# Altium PCB STM32_PCB.PcbDoc
Units mm, origin at the board's own origin, x right, y up, seen from the top; angles counter-clockwise.
Board outline 36.5 x 35.7 mm, 4 copper layers (L1(Signal), L2(GND), L3(GND), L4(Signal)), stack 1.57 mm thick; 35 components, 27 nets, 173 pads, 104 vias.
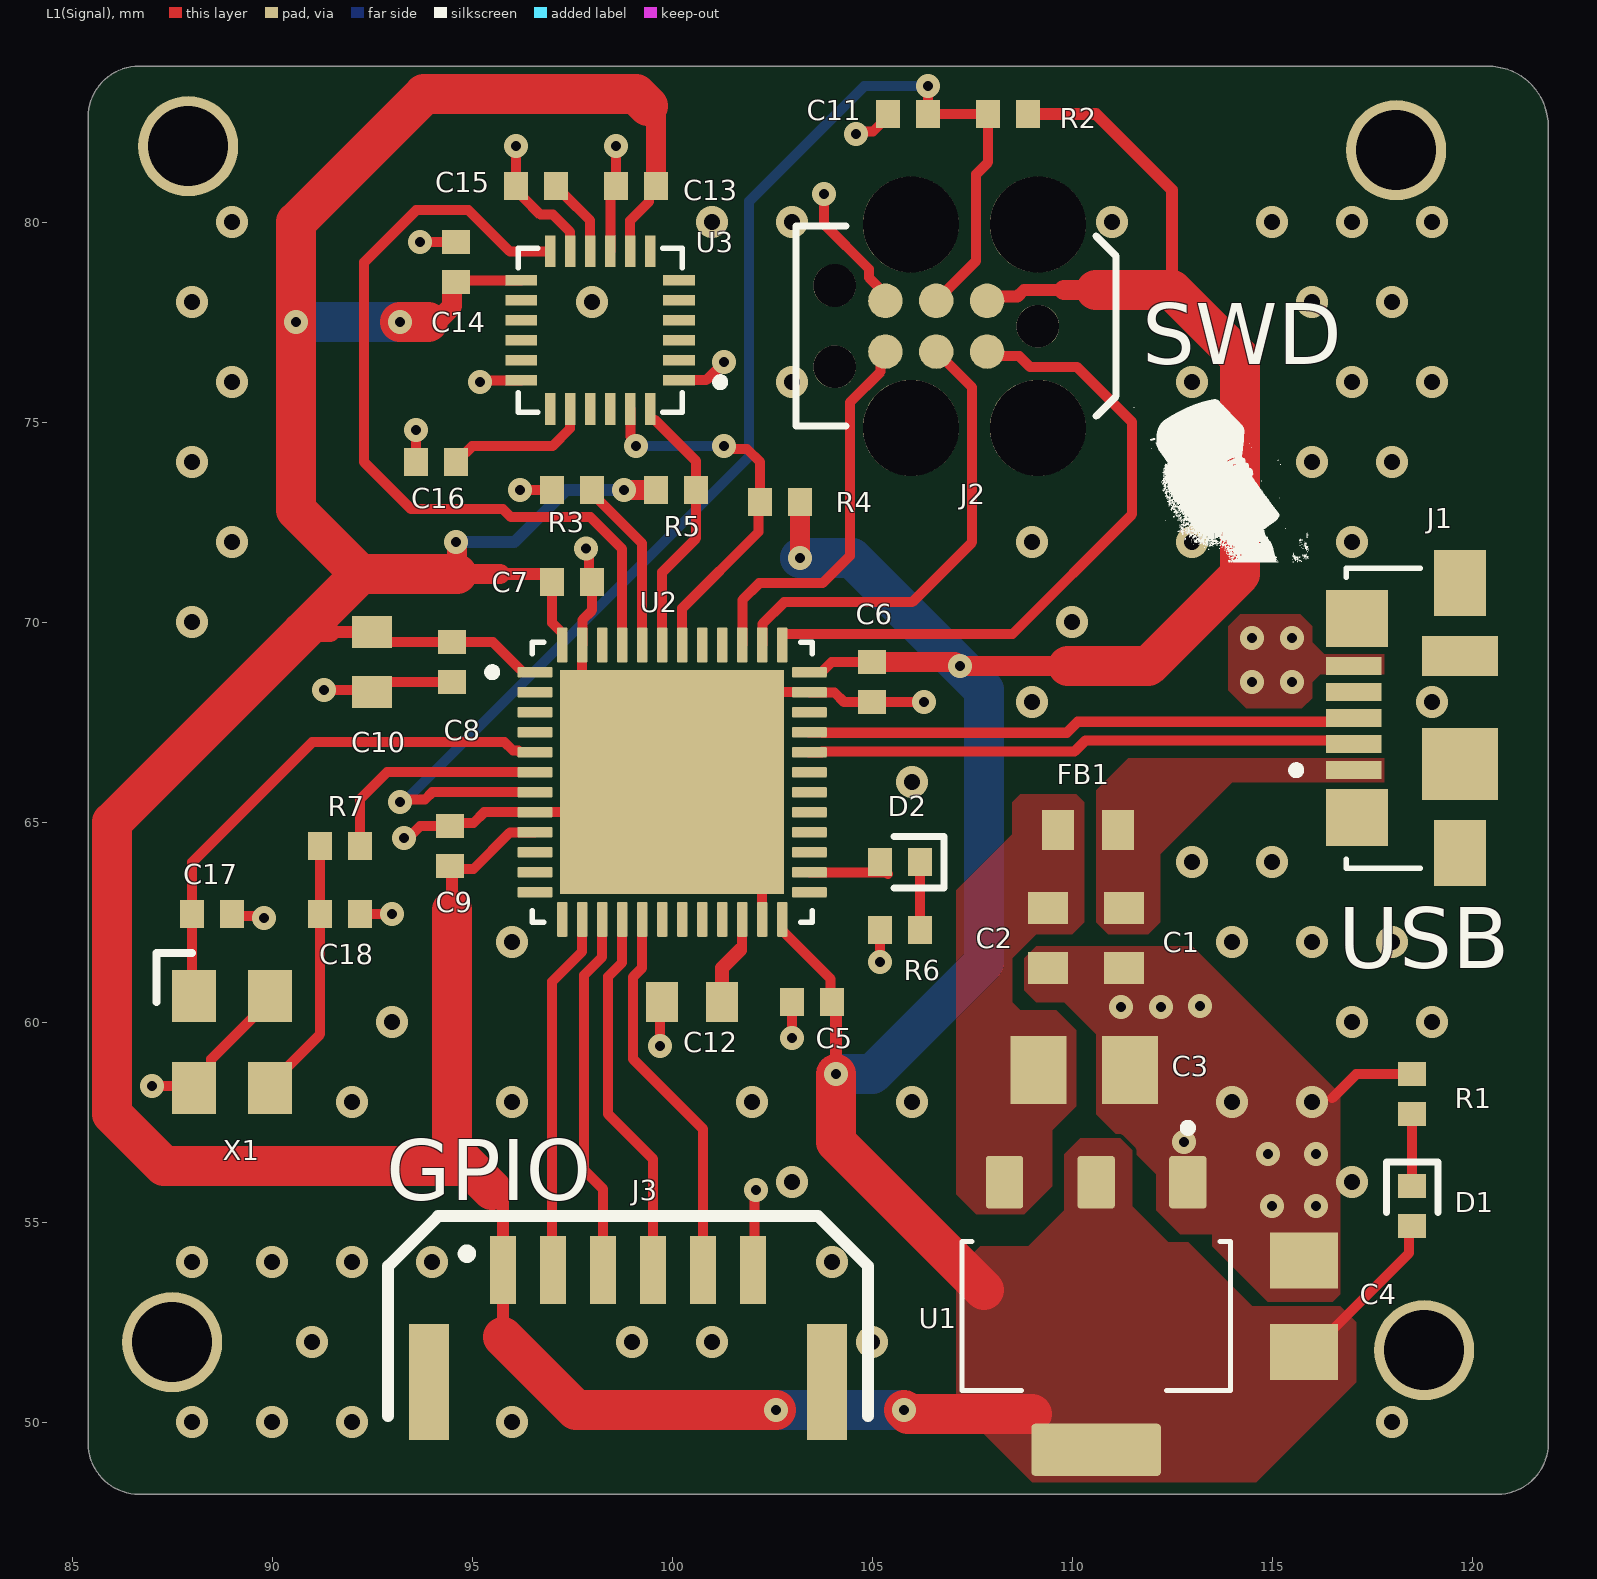
[diagram p0: L1(Signal) view]
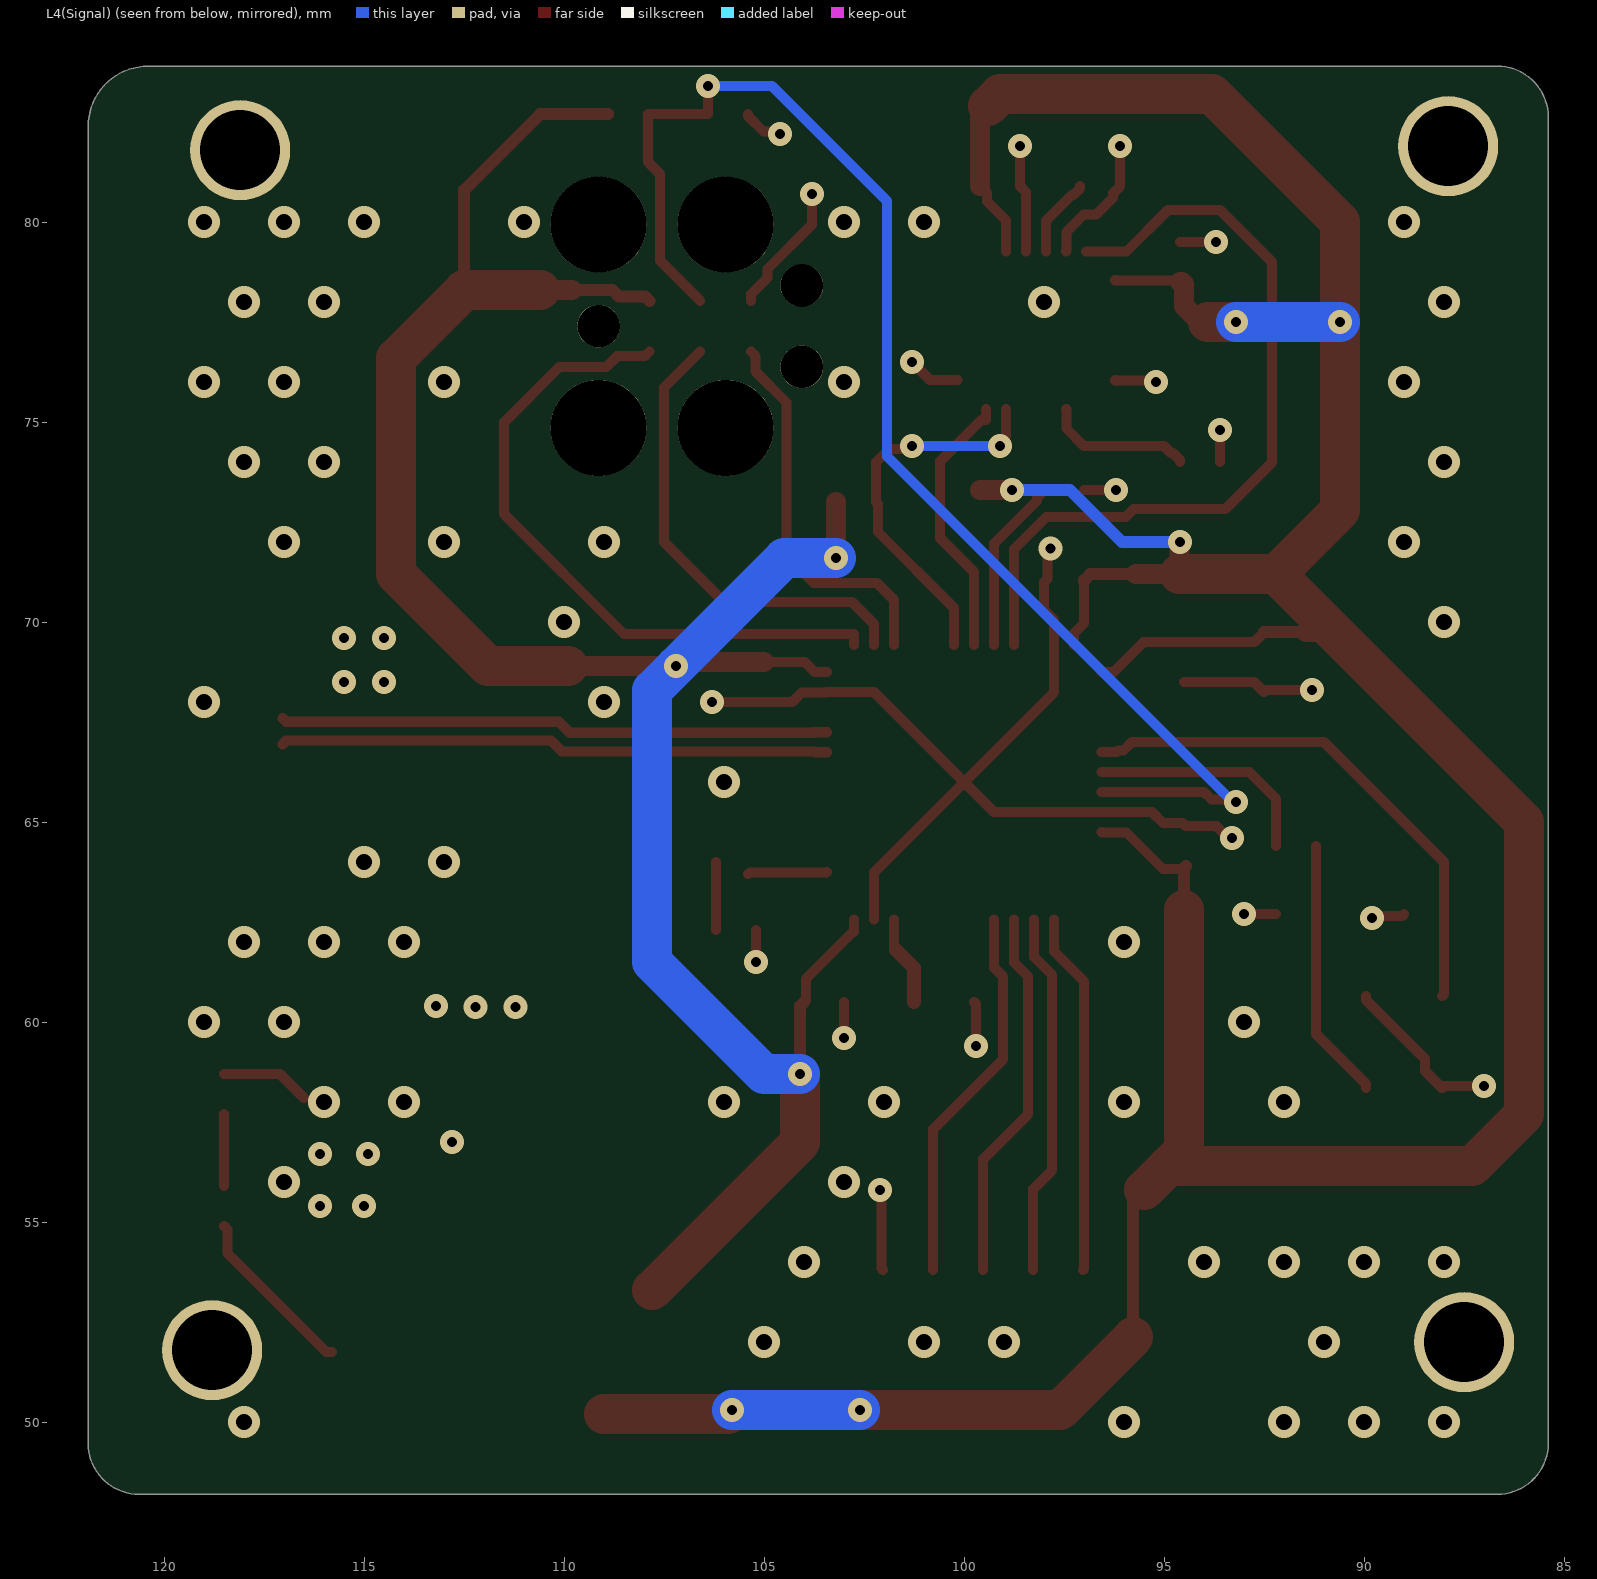
[diagram p1: L4(Signal) view, seen from below]
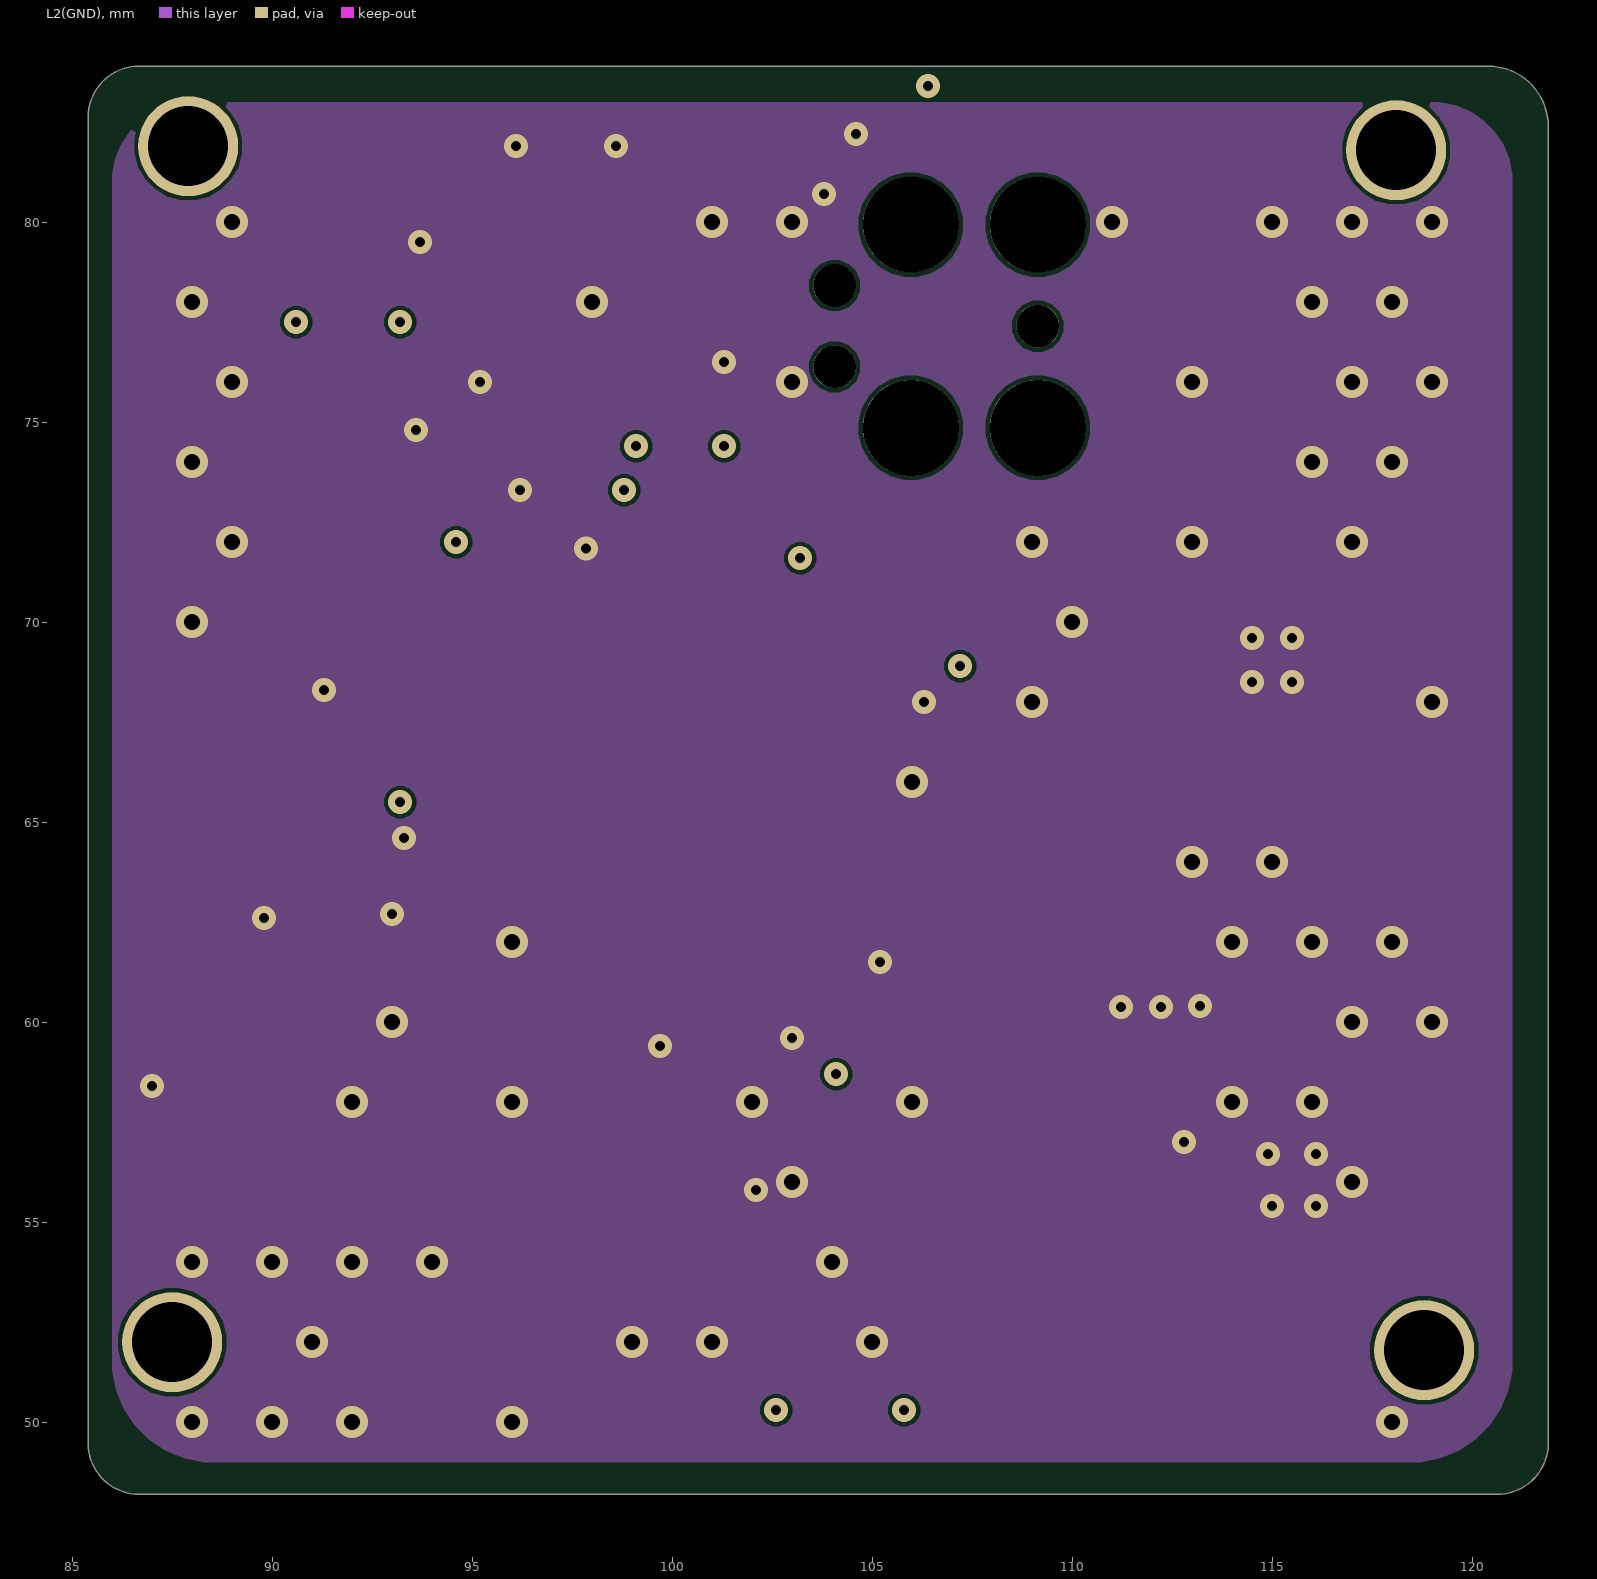
[diagram p2: L2(GND)]
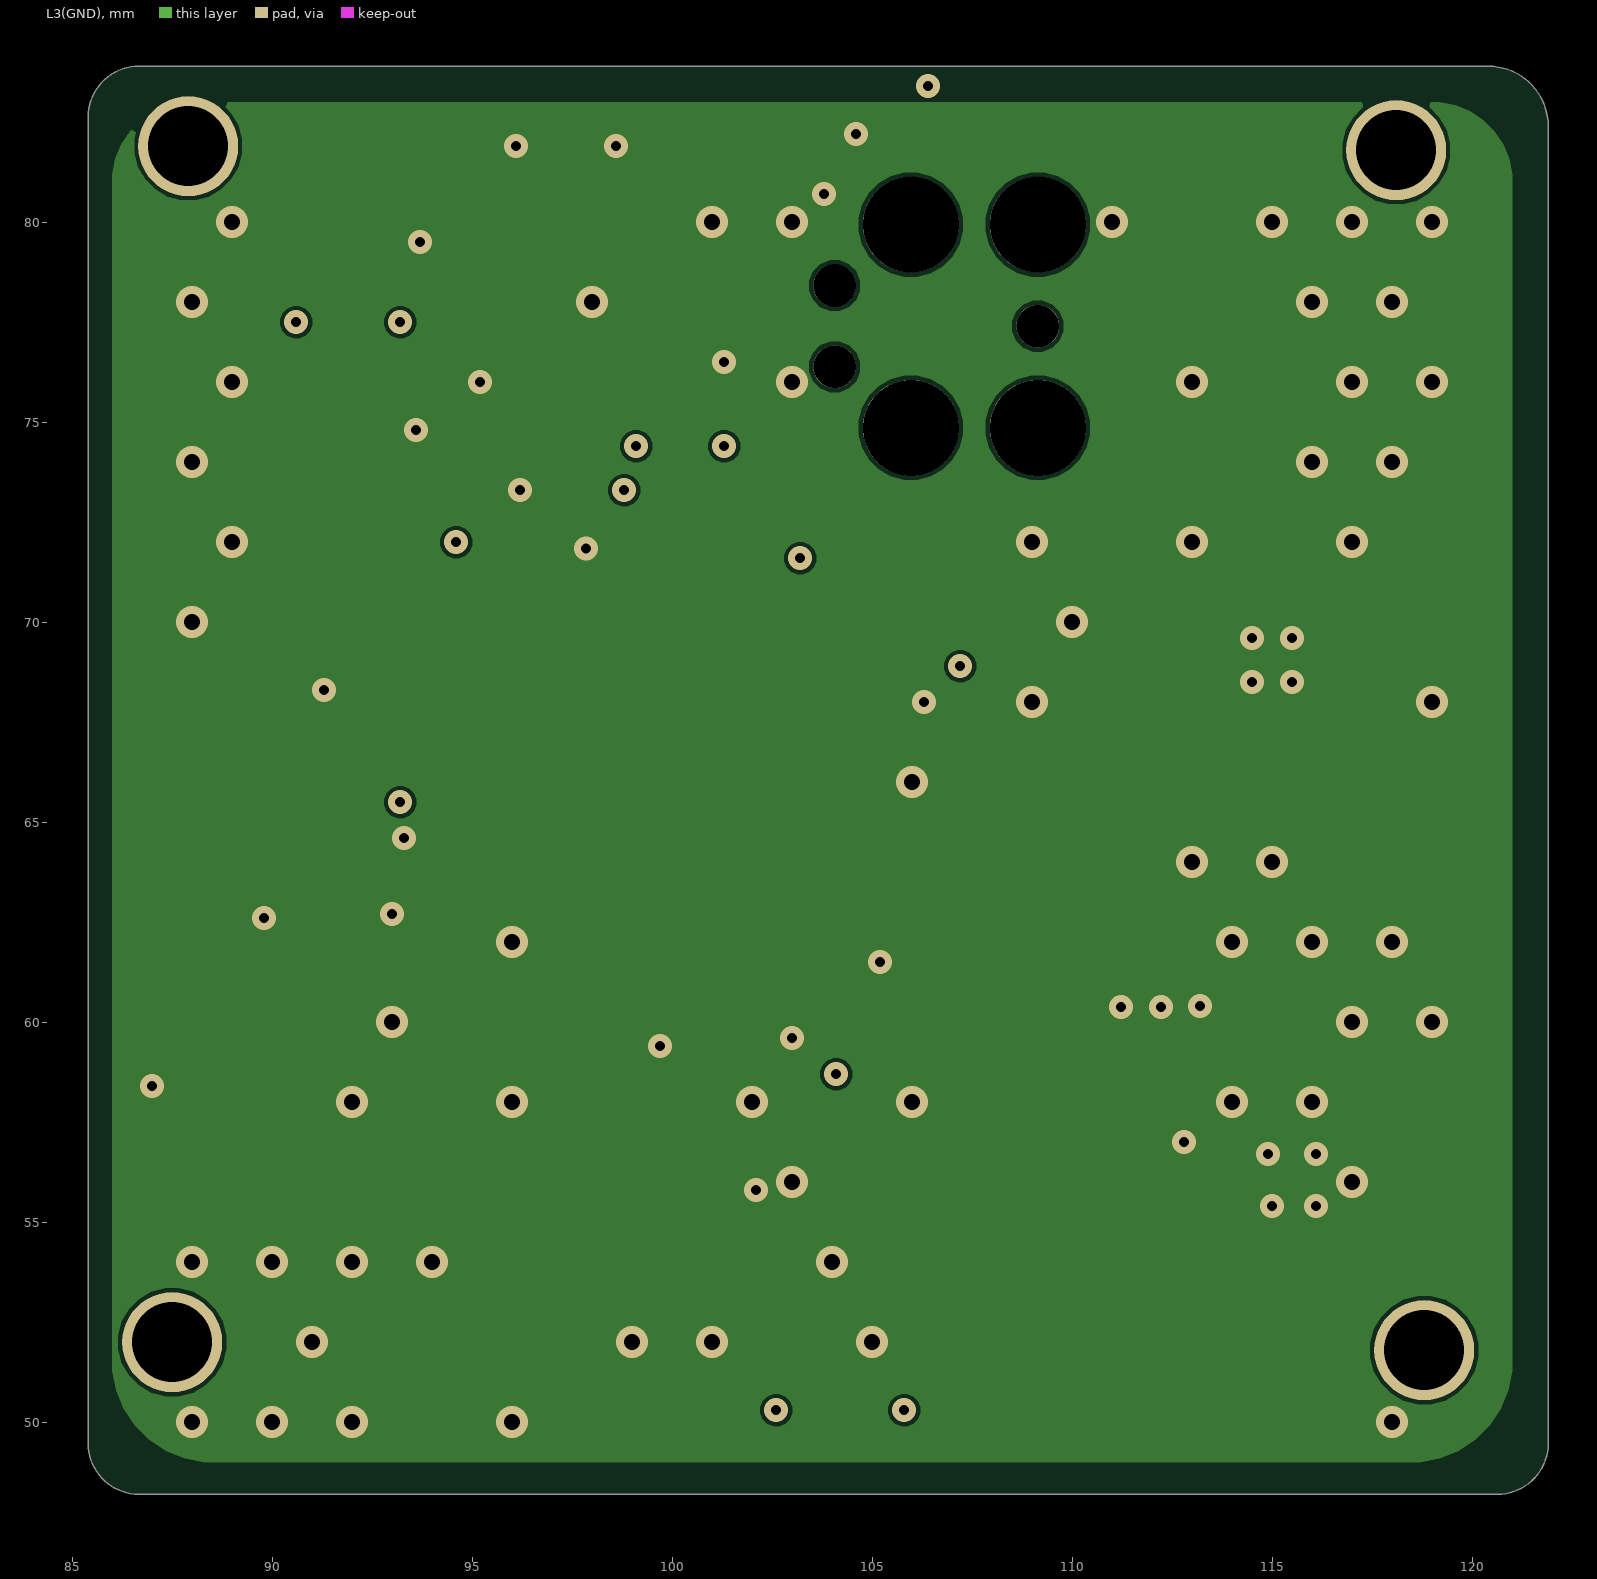
[diagram p3: L3(GND)]
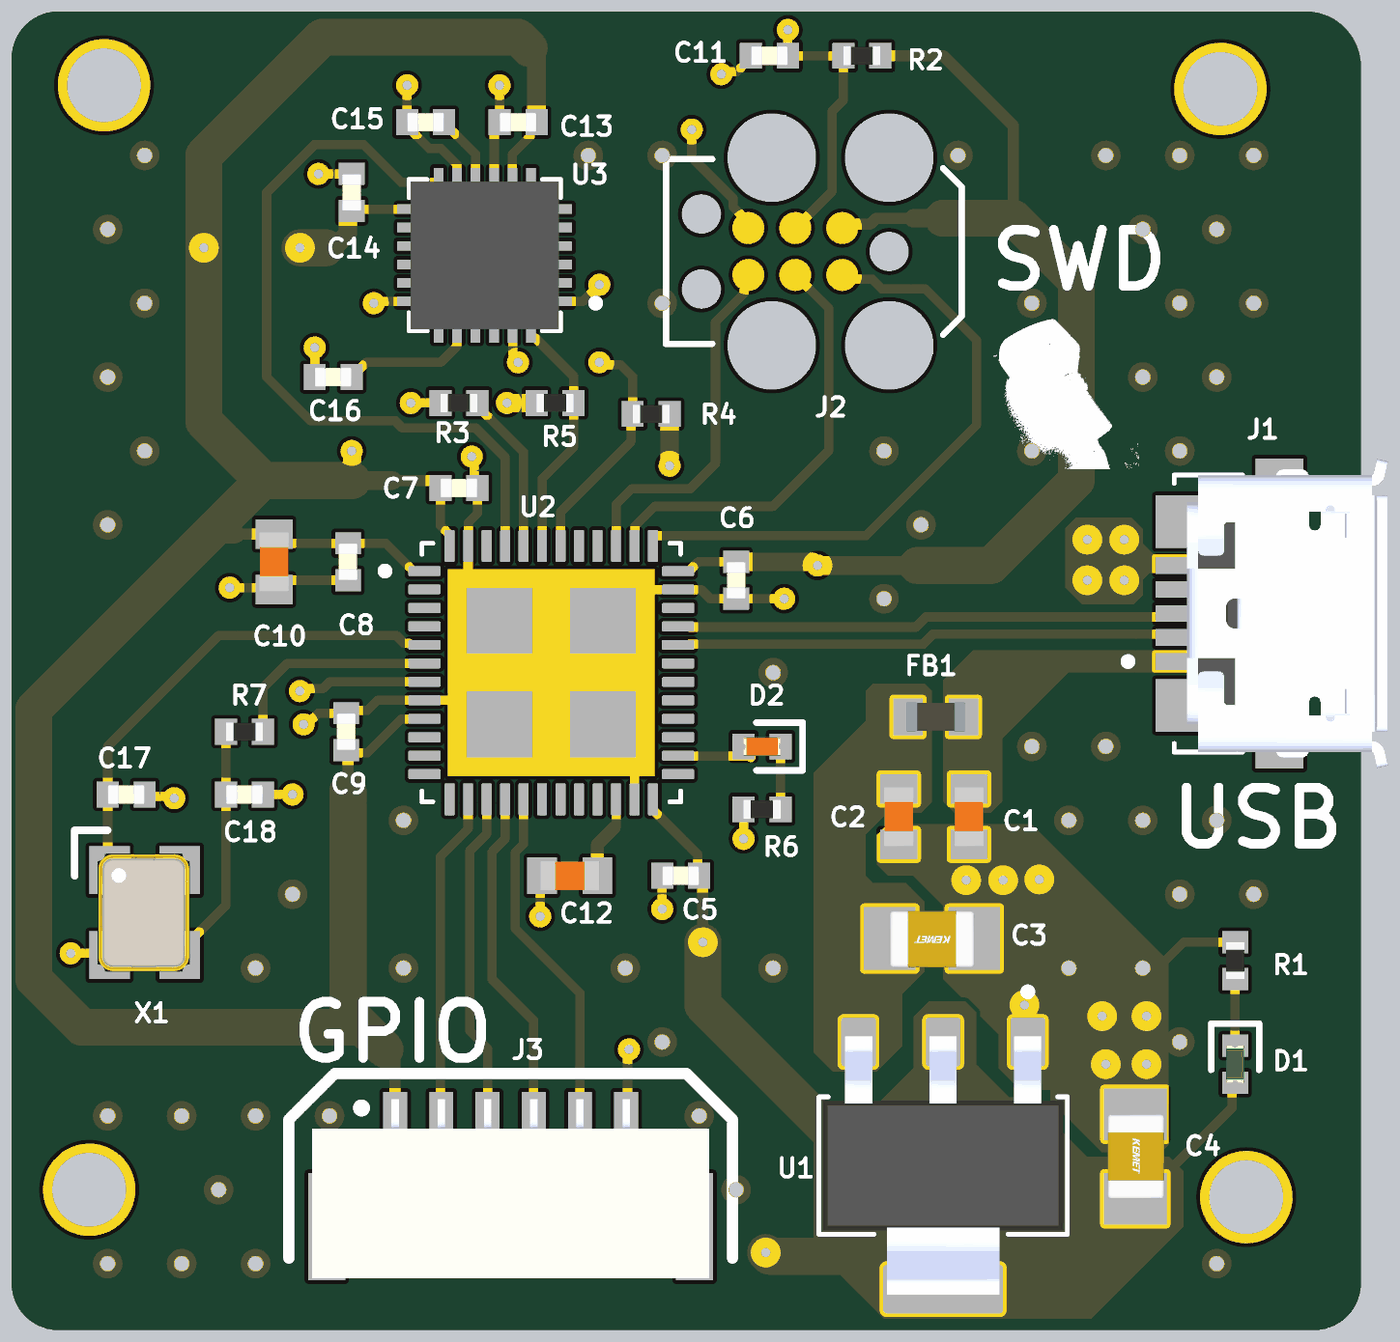
[diagram p4: 3D render of the assembled board from above, using the file's embedded part models]

## Layer stack, top to bottom
Top Solder: solder mask 0.0254, SM-001, Dk 4
L1(Signal): signal copper 0.035
Dielectric 1: prepreg 0.2, PP-017, Dk 4.6
L2(GND): signal copper 0.0175
Dielectric 3: core 1.065, Core-039, Dk 4.6
L3(GND): signal copper 0.0175
Dielectric 5: prepreg 0.2, PP-017, Dk 4.6
L4(Signal): signal copper 0.035
Bottom Solder: solder mask 0.0254, SM-001, Dk 4

## Board outline
85.4,49.47 ccw(c86.67,49.47) 86.67,48.2 120.63,48.2 ccw(c120.63,49.47) 121.9,49.47 121.9,82.4 ccw(c120.4,82.4) 120.4,83.9 86.67,83.9 ccw(c86.67,82.63) 85.4,82.63

## Design rules (kind name [scope] priority, off if disabled: settings)
Clearance [All] p1: gap=0.1 ignorepadtopadclearanceinfootprint=FALSE except(0.2: Arc-Arc Arc-Track Arc-SMDPad Arc-THPad Arc-Via Arc-Fill Arc-Poly Arc-Region Arc-Text Arc-Hole Track-Track Track-SMDPad Track-THPad Track-Via Track-Fill Track-Poly Track-Region Track-Text Track-Hole)
DiffPairsRouting [All] p1: maxlimit=0.254 minlimit=0.203 mostfreqgap=0.254 toplayer_maxgap=0.203 toplayer_prefgap=0.203 toplayer_minwidth=0.26 toplayer_maxwidth=0.26 toplayer_prefwidth=0.26 bottomlayer_maxgap=0.203 bottomlayer_prefgap=0.203 bottomlayer_minwidth=0.26 bottomlayer_maxwidth=0.26 bottomlayer_prefwidth=0.26 impedanceprofiledriven=TRUE impedanceprofileid={DF4BFFB4-0119-41E8-B807-2B4DCC01C45F} impedanceprofilevalue=90.000000 maxuncoupledlength=12.7
PolygonConnect [All] p1: connectstyle=Direct reliefconductorwidth=0.254 reliefentries=4 polygonreliefangle="90 Angle" airgapwidth=0.254
RoutingVias [All] p1: holewidth=0.3 width=0.7 viastyle="Through Hole" minholewidth=0.25 minwidth=0.55 maxholewidth=0.4 maxwidth=0.9
SolderMaskExpansion [All] p1: expansion=0.102 istentingtop=FALSE
UnRoutedNet [All] p1: checkbadconnections=TRUE
Width [All] p1: maxlimit=1 minlimit=0.2 preferedwidth=0.3
28 further rules are at their usual default settings.

## Classes and differential pairs
differential pair USB_D: +USB_D_P -USB_D_N

## Components (designator, comment, footprint, x,y, rotation, side; value= is the part's Value field where it differs from the comment)
C1 "2u2" CAP_0603 111.3,62.1 r90 top
C2 "2u2" CAP_0603 109.4,62.1 r90 top
C3 "22u" CAP_0805 110.3,58.8 r180 top
C4 "22u" CAP_0805 115.8,52.9 r270 top
C5 "100n" CAP_0402 103.5,60.5 r0 top
C6 "100n" CAP_0402 105,68.5 r90 top
C7 "100n" CAP_0402 97.5,71 r180 top
C8 "100n" CAP_0402 94.5,69 r90 top
C9 "100n" CAP_0402 94.45,64.4 r90 top
C10 "2u2" CAP_0603 92.5,69 r270 top
C11 "100n" CAP_0402 105.9,82.7 r0 top
C12 "2u2" CAP_0603 100.5,60.5 r180 top
C13 "10n" CAP_0402 99.1,80.9 r180 top
C14 "100n" CAP_0402 94.6,79 r90 top
C15 "100n" CAP_0402 96.6,80.9 r180 top
C16 "2n2" CAP_0402 94.1,74 r180 top
C17 "10p" CAP_0402 88.5,62.7 r180 top
C18 "10p" CAP_0402 91.7,62.7 r180 top
D1 "GREEN" LED_0402_GREEN 118.5,55.4 r90 top
D2 "RED" LED_0402_RED 105.7,64 r0 top
FB1 "120R" FB_0603 110.4,64.8 r180 top
J1 "47346-0001" MOLEX_47346-0001 119.7,67.6 r90 top
J2 "TC2030" TC2030-FP 106.6,77.4 r180 top
J3 "SM06B-GHS-TB" SM06B-GHS-TB 98.9,52.4 r0 top
R1 "1k" RES_0402 118.5,58.2 r270 top
R2 "10k" RES_0402 108.4,82.7 r0 top
R3 "10k" RES_0402 97.5,73.3 r0 top
R4 "2k2" RES_0402 102.7,73 r0 top
R5 "2k2" RES_0402 100.1,73.3 r180 top
R6 "1k" RES_0402 105.7,62.3 r180 top
R7 "0R" RES_0402 91.7,64.4 r0 top
U1 "AMS1117" SOT229P700X180-4N 110.6,52.655 r270 top
U2 "STM32F411CEU6" QFN50P700X700X60-49N 100,66 r0 top
U3 "MPU-6050" QFN50P400X400X95-24N 98.2,77.3 r180 top
X1 "24MHz" XTAL_3225 89,59.5 r270 top

## Footprints (in the part's own frame and the unit in brackets; to place one, negate y for a bottom-side part, rotate by r counter-clockwise, add the part's x,y. Pads: shape width x height; smd on the part's side, far side on the other; paste and mask are expansions set on the pad)
CAP_0402 [mm]
  rect 0.6x0.7 smd: 1(-0.5,0) 2(0.5,0)
  body extent -0.5,-0.26 0.5,0.26, height 0.37
CAP_0603 [mm]
  rect 0.8x1 smd: 1(-0.75,0) 2(0.75,0)
  body extent -0.8,-0.4 0.8,0.4, height 0.51
CAP_0805 [mm]
  rect 1.4x1.7 smd: 1(-1.143,0) 2(1.143,0)
  body extent -1.15,-0.76 1.15,0.79, height 1.01
FB_0603 [mm]
  rect 0.8x1 smd: 1(-0.75,0) 2(0.75,0)
  body extent -0.8,-0.4 0.8,0.4, height 0.81
LED_0402_GREEN [mm]
  rect 0.6x0.7 smd: A(-0.5,0) K(0.5,0)
  silkscreen extent -0.15,-0.65 1.1,0.65, body extent -0.51,-0.25 0.51,0.25, height 0.45
LED_0402_RED [mm]
  rect 0.6x0.7 smd: A(-0.5,0) K(0.5,0)
  silkscreen extent -0.15,-0.65 1.1,0.65, body extent -0.51,-0.25 0.51,0.25, height 0.45
MOLEX_47346-0001 [mm]
  rect 0.45x1.38 smd: 1(-1.3,2.66) 2(-0.65,2.66) 3(0,2.66) 4(0.65,2.66) 5(1.3,2.66)
  rect 1.425x1.55 smd: S1(-2.488,2.575) S2(2.488,2.575)
  rect 1.65x1.3 smd: S3(-3.375,0) S6(3.375,0)
  rect 1.8x1.9 smd: S4(-1.15,0)
  rect 1x1.9 smd: S5(1.55,0)
  silkscreen extent -3.75,1 3.75,4.2, body extent -4.18,-2.93 4.18,2.5, height 2.7
QFN50P400X400X95-24N [mm]
  rect 0.79x0.26 smd: 1(-1.97,1.25) 2(-1.97,0.75) 3(-1.97,0.25) 4(-1.97,-0.25) 5(-1.97,-0.75) 6(-1.97,-1.25) 13(1.97,-1.25) 14(1.97,-0.75) 15(1.97,-0.25) 16(1.97,0.25) 17(1.97,0.75) 18(1.97,1.25)
  rect 0.26x0.79 smd: 7(-1.25,-1.97) 8(-0.75,-1.97) 9(-0.25,-1.97) 10(0.25,-1.97) 11(0.75,-1.97) 12(1.25,-1.97) 19(1.25,1.97) 20(0.75,1.97) 21(0.25,1.97) 22(-0.25,1.97) 23(-0.75,1.97) 24(-1.25,1.97)
  silkscreen extent -3.1,-2.05 2.05,2.05, body extent -2,-2 2,2, height 0.93
QFN50P700X700X60-49N [mm]
  rrect25% 0.87x0.27 smd: 1(-3.43,2.75) 2(-3.43,2.25) 3(-3.43,1.75) 4(-3.43,1.25) 5(-3.43,0.75) 6(-3.43,0.25) 7(-3.43,-0.25) 8(-3.43,-0.75) 9(-3.43,-1.25) 10(-3.43,-1.75) 11(-3.43,-2.25) 12(-3.43,-2.75) 25(3.43,-2.75) 26(3.43,-2.25) 27(3.43,-1.75) 28(3.43,-1.25) 29(3.43,-0.75) 30(3.43,-0.25) 31(3.43,0.25) 32(3.43,0.75) 33(3.43,1.25) 34(3.43,1.75) 35(3.43,2.25) 36(3.43,2.75)
  rrect25% 0.27x0.87 smd: 13(-2.75,-3.43) 14(-2.25,-3.43) 15(-1.75,-3.43) 16(-1.25,-3.43) 17(-0.75,-3.43) 18(-0.25,-3.43) 19(0.25,-3.43) 20(0.75,-3.43) 21(1.25,-3.43) 22(1.75,-3.43) 23(2.25,-3.43) 24(2.75,-3.43) 37(2.75,3.43) 38(2.25,3.43) 39(1.75,3.43) 40(1.25,3.43) 41(0.75,3.43) 42(0.25,3.43) 43(-0.25,3.43) 44(-0.75,3.43) 45(-1.25,3.43) 46(-1.75,3.43) 47(-2.25,3.43) 48(-2.75,3.43)
  rect 5.6x5.6 smd paste-4: 49(0,0)
  silkscreen extent -4.6,-3.5 3.5,3.5
RES_0402 [mm]
  rect 0.6x0.7 smd: 1(-0.5,0) 2(0.5,0)
  body extent -0.5,-0.25 0.5,0.25, height 0.3
SM06B-GHS-TB [mm]
  rect 0.65x1.7 smd: 1(-3.125,1.4) 2(-1.875,1.4) 3(-0.625,1.4) 4(0.625,1.4) 5(1.875,1.4) 6(3.125,1.4)
  rect 1x2.9 smd: ""(-4.975,-1.4) ""(4.975,-1.4)
  silkscreen extent -6,-2.25 6,2.75, body extent -5.38,-2.8 5.38,2.05, height 4.26
SOT229P700X180-4N [mm]
  rrect15% 1.31x0.93 smd: 1(-3.345,2.29) 2(-3.345,0) 3(-3.345,-2.29)
  rrect15% 1.31x3.24 smd: 4(3.345,0)
  silkscreen extent -4.8,-3.36 1.86,3.36, body extent -3.5,-3.25 3.5,3.25, height 1.8
TC2030-FP [mm]
  round 0.863 smd paste-0.432: 1(-1.27,-0.635) 2(-1.27,0.635) 3(0,-0.635) 4(0,0.635) 5(1.27,-0.635) 6(1.27,0.635)
  round 2.4 hole 2.4 unplated: MH(-2.54,2.54) MH(-2.54,-2.54) MH(0.635,2.54) MH(0.635,-2.54)
  round 1.067 hole 1.067 unplated: MH(-2.54,0) MH(2.54,-1.016) MH(2.54,1.016)
  silkscreen extent -4.5,-2.5 3.5,2.5
XTAL_3225 [mm]
  rect 1.3x1.1 smd: 1(-1.15,-0.95) 2(1.15,-0.95) 3(1.15,0.95) 4(-1.15,0.95)
  silkscreen extent -2.23,-1.89 -1,-1, body extent -1.6,-1.28 1.6,1.22, height 0.61

## Part data
C1 C2 C10 C12: library part CAP_0603_16V, "Capacitor SMD 0603 16V"
C3 C4: library part CAP_0805_16V, "Capacitor SMD 0805 16V"
C5 C6 C7 C8 C9 C11 C13 C14 C15 C16 C17 C18: library part CAP_0402_16V, "Capacitor SMD 0402 16V"
D1: library part LED_0402_GREEN, "LED 0402 GREEN SMD"
D2: library part LED_0402_RED, "LED 0402 RED SMD"
FB1: library part FB_0603, "Ferrite Bead SMD 0603"
J1: "USB - micro B USB 2.0 Receptacle Connector 5 Position Surface Mount, Right Angle", Package=None, Availability="In Stock", Check_prices=https://www.snapeda.com/parts/47346-0001/Molex/view-part/?ref=eda, MF=Molex, MP=47346-0001, Price=None, Purchase-URL=https://pricing.snapeda.com/search/part/47346-0001/?ref=eda, SnapEDA_Link=https://www.snapeda.com/parts/47346-0001/Molex/view-part/?ref=snap
J2: "Tag-Connect No-Solder SWD Debug Connector DO NOT PLACE", Manufacturer=Tag-Connect, Manufacturer Part Number=TC2030
J3: "Header Connector 6 Position 1.25MM Pitch SMD Horizontal JST GH", Manufacturer=JST, Manufacturer Part Number=SM06B-GHS-TB
R1 R2 R3 R4 R5 R6 R7: library part RES_0402, "Resistor SMD 0402"
U1: "1A LOW DROPOUT VOLTAGE REGULATOR SOT-223", Package="SOT-223 Seeed Technology", Availability="Not in stock", Check_prices=https://www.snapeda.com/parts/AMS1117/Advanced+Monolithic+Systems/view-part/?ref=eda, MF="Advanced Monolithic Systems", MP=AMS1117, Price=None, SnapEDA_Link=https://www.snapeda.com/parts/AMS1117/Advanced+Monolithic+Systems/view-part/?ref=snap
U2: "High-performance access line, ARM Cortex-M4 core with DSP and FPU, 512 Kbytes Flash, 100 MHz CPU, ART Accelerator", Package=None, Availability=Unavailable, MP=STM32F411CEU6, Price=None
U3: "MPU-6050 series Accelerometer, Gyroscope, 3 Axis Sensor Evaluation Board", Package="QFN-24 InvenSense", Availability="In Stock", Check_prices=https://www.snapeda.com/parts/MPU-6050/TDK+InvenSense/view-part/?ref=eda, MF="TDK InvenSense", MP=MPU-6050, Price=None, Purchase-URL=https://pricing.snapeda.com/search/part/MPU-6050/?ref=eda, SnapEDA_Link=https://www.snapeda.com/parts/MPU-6050/TDK+InvenSense/view-part/?ref=snap
X1: library part TSX-3225_24.0000MF15X-AC, "Crystal SMD 24MHz 10PPM 7pF 3225", Manufacturer=Epson, Manufacturer Part Number="TSX-3225 24.0000MF15X-AC"

## Free pads (board coordinates)
  round 2.5 hole 2: 1(87.5,52) 1(87.9,81.9) 1(118.1,81.8) 1(118.8,51.8)

## Via types
v1: diameter 0.8, hole 0.4, L1(Signal) to L4(Signal), tented both sides, 59 vias
v2: diameter 0.6, hole 0.25, L1(Signal) to L4(Signal), 45 vias

## Nets (pads, with @x,y where several pads share a name; then routed paths per layer and width w, separated by ;. In a path a pad name is that pad's centre, name@x,y a point inside that pad or via, vN(x,y) a via of type N, cw(c..) or ccw(c..) an arc to the next point about the centre after c; other vN are vias at no path point)
+3V3: C4.2 C5.2 C6.2 C7.2 C8.2 C9.1 C10.1 C13.1 C14.1 D1.A J2.1 J3.1 R2.2 R4.2 R5.2 U1.2 U1.4 U2.1 U2.9 U2.24 U2.36 U2.48 U3.8 U3.13 | length 169.7
  L1(Signal) w0.25: C10.1 92.75,69.5 C8.2 95.52,69.5 96.27,68.75 U2.1 ; C9.1@94.5,63.85 94.521,63.829 95.029,63.829 95.94,64.74 96.56,64.74 U2.9 ; C14.1 94.645,78.545 96.225,78.545 U3.13 ; C7.2 97,69.98 97.25,69.73 U2.48 ; U3.8 98.95,80.04 99.425,80.515 99.425,80.725 C13.1 ; U2.24 102.75,62.27 102.76,62.26 102.78,62.26 103.961,61.079 103.961,60.539 C5.2 ; U2.36 103.73,68.75 103.98,69 104.2,69 C6.2 ; C4.2 115.95,51.757 118.418,54.225 118.418,54.818 D1.A
  L1(Signal) w0.3: 91.45,69.75 C10.1 ; C9.1 94.5,63.85 94.5,62.8 ; 95.5,55.8 95.775,55.525 J3.1 95.775,52.125 ; 95.7,71.2 96.85,71.2 97,71.05 C7.2 ; C5.2 104.1,60.4 v2(104.1,58.7) ; J2.1 107.978,78.143 108.633,78.143 108.791,78.3 109.8,78.3 ; R2.2 110.6,82.7 112.5,80.8 112.5,78.3
  L1(Signal) w0.5: 90.75,69.75 91.45,69.75 ; 93.9,77.5 94.1,77.5 94.5,77.9 94.5,78.45 94.55,78.5 C14.1 ; v2(94.6,72) 94.614,71.986 94.614,71.414 ; 94.614,71.2 94.614,71.414 ; 95.7,71.2 94.828,71.2 94.614,71.414 ; v2(98.8,73.3) R5.2 ; 99.4,82.9 99.6,82.7 C13.1 ; v2(103.2,71.6) R4.2 ; C6.2 107.073,69 107.173,68.9 v2(107.2,68.9) 109.9,68.9 ; 109.8,78.3 110.6,78.3
  L1(Signal) w1: v2(93.2,77.5) 93.9,77.5 ; 94.5,62.8 94.5,56.8 94.9,56.4 ; 94.614,71.2 92.2,71.2 ; 95.5,55.8 94.9,56.4 ; 95.775,52.125 97.6,50.3 v2(102.6,50.3) ; 99.4,82.9 99.1,83.2 93.8,83.2 90.6,80 v2(90.6,77.5) 90.6,72.8 92.2,71.2 ; v2(104.1,58.7) 104.1,57 107.8,53.3 ; v2(105.8,50.3) 105.9,50.2 109,50.2 ; 109.9,68.9 111.9,68.9 114.2,71.2 114.2,76.6 112.5,78.3 110.6,78.3 ; 92.2,71.2 90.75,69.75 86,65 86,57.7 87.3,56.4 94.9,56.4
  L4(Signal) w0.3: v2(94.6,72) 96.05,72 97.35,73.3 v2(98.8,73.3)
  L4(Signal) w1: v2(90.6,77.5) v2(93.2,77.5) ; v2(102.6,50.3) v2(105.8,50.3) ; v2(103.2,71.6) 104.5,71.6 v2(107.2,68.9) 107.8,68.3 107.8,61.5 105,58.7 v2(104.1,58.7)
+5V: C2.2 C3.2 FB1.2 U1.3
GND: C1.1 C2.1 C3.1 C4.1 C5.1 C6.1 C7.1 C8.1 C9.2 C10.2 C11.1 C12.2 C13.2 C14.2 C15.2 C16.2 C17.1 C18.1 J1.5 J2.5 J3.6 R1.1 R3.1 R6.2 U1.1 U2.8 U2.23 U2.35 U2.47 U2.49 U3.1 U3.9 U3.11 U3.18 X1.2 X1.4 | length 57.4
  L1(Signal) w0.25: v2(87,58.4) 88,58.4 X1.2 88.475,58.775 88.475,59.075 89.95,60.55 X1.4 ; C17.1 89.05,62.65 89.75,62.65 v2(89.8,62.6) ; v2(91.3,68.3) 92.45,68.3 C10.2 92.75,68.5 C8.1 ; C18.1 v2(93,62.7) ; v2(93.3,64.6) 93.395,64.6 93.695,64.9 C9.2 94.529,64.979 95.029,64.979 95.3,65.25 U2.8 99.25,65.25 U2.49 ; C16.2 v2(93.6,74.8) ; v2(93.7,79.5) C14.2 ; v2(95.2,76) 95.245,76.045 96.225,76.045 U3.18 ; v2(96.1,81.9) C15.2 96.275,80.725 96.275,80.615 96.703,80.188 97.017,80.188 97.445,79.76 97.445,79.275 U3.11 ; v2(96.2,73.3) R3.1 ; v2(97.848,71.848) 97.915,71.781 97.915,71.085 C7.1 98,70.3 97.76,70.06 97.76,69.44 U2.47 97.75,68.25 U2.49 ; U3.9 98.455,79.275 98.455,80.755 C13.2 v2(98.6,81.9) ; v2(99.7,59.4) 99.7,60.45 C12.2 ; U3.1 100.85,76.05 v2(101.3,76.5) ; J3.6 102.063,53.837 102.063,55.763 v2(102.1,55.8) ; U2.23 102.25,63.75 U2.49 ; v2(103,59.6) C5.1 ; v2(103.8,80.7) 103.8,79.948 104.918,78.83 104.918,78.612 105.33,78.201 J2.5 ; v2(104.6,82.2) 104.667,82.267 105.017,82.267 105.4,82.65 C11.1 ; v2(105.2,61.5) R6.2 ; v2(106.3,68) C6.1 104.3,68 104.06,68.24 103.44,68.24 U2.35 102.25,68.25 U2.49 ; 116.5,58.1 117.1,58.7 R1.1
  other v1: 88,50 90,50 92,50 96,50 118,50 91,52 99,52 101,52 105,52 88,54 90,54 92,54 94,54 104,54 103,56 117,56 92,58 96,58 102,58 106,58 114,58 116,58 93,60 117,60 119,60 96,62 114,62 116,62 118,62 113,64 115,64 106,66 109,68 119,68 88,70 110,70 89,72 109,72 113,72 117,72 88,74 116,74 118,74 89,76 103,76 113,76 117,76 119,76 88,78 98,78 116,78 118,78 89,80 101,80 103,80 111,80 115,80 117,80 119,80
  other v2: 115,55.4 116.1,55.4 114.9,56.7 116.1,56.7 112.8,57 111.223,60.381 112.223,60.381 113.2,60.4 114.5,68.5 115.5,68.5 114.5,69.6 115.5,69.6
IMU_CPOUT: C16.1 U3.20 | length 3.7
  L1(Signal) w0.25: C16.1 94.6,74.05 94.775,74.225 94.825,74.225 95,74.4 97.005,74.4 97.445,74.84 97.445,75.325 U3.20
IMU_INT: U2.45 U3.12 | length 20.4
  L1(Signal) w0.25: U3.12 95.94,79.27 94.91,80.3 93.6,80.3 92.3,79 92.3,74 93.475,72.825 95.767,72.825 95.967,72.625 97.955,72.625 98.75,71.83 U2.45
IMU_REGOUT: C15.1 U3.10 | length 2
  L1(Signal) w0.25: C15.1 97.1,80.85 97.275,80.675 97.315,80.675 97.95,80.04 U3.10
IMU_SCL: R4.1 U2.42 U3.23 | length 9.6
  L1(Signal) w0.25: U3.23 98.955,75.325 98.955,74.64 99.1,74.495 v2(99.1,74.4) ; U2.42 100.25,70.35 102.155,72.255 102.155,72.955 R4.1 102.2,74.005 101.872,74.333 101.367,74.333 v2(101.3,74.4)
  L4(Signal) w0.25: v2(99.1,74.4) v2(101.3,74.4)
IMU_SDA: R5.1 U2.43 U3.24 | length 6.8
  L1(Signal) w0.25: U3.24 99.45,75.065 99.455,75.06 99.565,75.06 100.6,74.025 R5.1 100.6,72.1 99.75,71.25 U2.43
LED_POWER_K: D1.K R1.2 | length 1.8
  L1(Signal) w0.25: D1.K R1.2
MCU_BOOT0: R3.2 U2.44 | length 4.4
  L1(Signal) w0.25: R3.2 98.175,73.125 98.175,73.041 99.25,71.966 U2.44
MCU_NRST: C11.2 J2.3 R2.1 U2.7 | length 35.2
  L1(Signal) w0.25: v2(93.2,65.5) 93.267,65.567 93.817,65.567 94,65.75 U2.7 ; v2(106.4,83.4) C11.2 R2.1 107.9,81.5 107.6,81.2 107.6,79.035 J2.3
  L4(Signal) w0.25: v2(93.2,65.5) 93.284,65.5 101.925,74.141 101.925,80.525 104.8,83.4 v2(106.4,83.4)
MCU_OSC_IN: C17.2 U2.5 X1.1 | length 13.3
  L1(Signal) w0.25: X1.1 88,60.7 C17.2 88,64 91,67 95.81,67 96.02,66.79 96.157,66.79 96.187,66.76 96.56,66.76 U2.5
MCU_OSC_OUT: R7.2 U2.6 | length 5.8
  L1(Signal) w0.25: R7.2 92.2,65.584 92.866,66.25 U2.6
MCU_PA4: J3.2 U2.14 | length 9.1
  L1(Signal) w0.25: J3.2 97,53.825 97,61.019 97.75,61.769 U2.14
MCU_PA5: J3.3 U2.15 | length 9.2
  L1(Signal) w0.25: U2.15 98.25,61.632 97.8,61.182 97.8,56.3 98.275,55.825 J3.3
MCU_PA6: J3.4 U2.16 | length 9.4
  L1(Signal) w0.25: U2.16 98.75,61.496 98.4,61.146 98.4,57.7 99.525,56.575 J3.4
MCU_PA7: J3.5 U2.17 | length 9.6
  L1(Signal) w0.25: U2.17 99.25,61.36 99.025,61.135 99.025,59.075 100.775,57.325 J3.5
MCU_SWCLK: J2.4 U2.38 | length 11.8
  L1(Signal) w0.25: U2.38 102.26,69.44 102.26,69.96 102.8,70.5 106,70.5 107.5,72 107.5,75.865 J2.4
MCU_SWDIO: J2.2 U2.37 | length 16.9
  L1(Signal) w0.25: U2.37 102.75,69.696 102.76,69.706 108.506,69.706 111.5,72.7 111.5,75 110.115,76.385 108.941,76.385 108.676,76.649 107.986,76.649 J2.2
MCU_SWO: J2.6 U2.39 | length 9.7
  L1(Signal) w0.25: U2.39 101.76,69.44 101.76,70.56 102.175,70.975 103.759,70.975 104.44,71.656 104.44,75.492 105.213,76.264 105.213,76.648 J2.6
MCU_VCAP1: C12.1 U2.22 | length 2.3
  L1(Signal) w0.25: 101.7,61.8 101.75,61.85 U2.22
  L1(Signal) w0.35: C12.1 101.25,61.35 101.7,61.8
MPU_LED_A: D2.A U2.26 | length 2
  L1(Signal) w0.25: U2.26 103.44,63.74 105.36,63.74 D2.A@105.4,63.7
MPU_LED_K: D2.K R6.1 | length 1.7
  L1(Signal) w0.25: R6.1 D2.K
USB_D_N: J1.2 U2.32 | length 13.8
  L1(Signal) w0.26: U2.32 103.73,66.75 103.748,66.768 110.058,66.768 110.333,67.043 116.947,67.043 J1.2
USB_D_P: J1.3 U2.33 | length 13.8
  L1(Signal) w0.26: U2.33 103.73,67.25 103.748,67.232 109.866,67.232 110.141,67.507 116.947,67.507 J1.3
VBUS: C1.2 FB1.1 J1.1
XTAL_IN: C18.2 R7.1 X1.3 | length 6.6
  L1(Signal) w0.25: X1.3 89.95,58.45 91.2,59.7 C18.2 R7.1
pads on no net: J1.4 J1.S1 J1.S2 J1.S3 J1.S4 J1.S5 J1.S6 J2.MH J3. U2.2 U2.3 U2.4 U2.10 U2.11 U2.12 U2.13 U2.18 U2.19 U2.20 U2.21 U2.25 U2.27 U2.28 U2.29 U2.30 U2.31 U2.34 U2.40 U2.41 U2.46 U3.2 U3.3 U3.4 U3.5 U3.6 U3.7 U3.14 U3.15 U3.16 U3.17 U3.19 U3.21 U3.22

## Polygon pours and split planes (outlines as drawn)
GND on L1(Signal) "GND_L01_P008" (solid, pour order 8): 117.8,69.2 116.3,69.2 116,69.5 116,69.9 115.7,70.2 114.2,70.2 113.9,69.9 113.9,68.3 114.4,67.8 115.7,67.8 116,68.1 116,68.5 116.2,68.7 117.8,68.7
+3V3 on L1(Signal) "+3V3_L01_P004" (solid, pour order 4): 109,48.5 114.6,48.5 117.1,51 117.1,52.5 116.7,52.9 114.5,52.9 112.9,54.5 112.4,54.5 111.5,55.4 111.5,56.8 111.2,57.1 110.2,57.1 109.8,56.7 109.8,55.3 108.9,54.4 107.7,54.4 107.1,53.8 107.1,50.4
GND on L1(Signal) "GND_L01_P007" (solid, pour order 7): 116.7,53.2 116.7,58.2 113,61.9 109.1,61.9 108.8,61.6 108.8,60.8 109.1,60.5 109.8,60.5 110.6,59.7 110.6,57.7 112.1,56.2 112.1,55.3 112.7,54.7 113.5,54.7 113.5,54.4 114.9,53 116.5,53
+5V on L1(Signal) "+5V_L01_P001" (solid, pour order 1): 108.5,64.7 107.1,63.3 107.1,55.7 107.6,55.2 108.8,55.2 109.5,55.9 109.5,57.3 110.1,57.9 110.1,59.8 109.6,60.3 108.7,60.3 108.5,60.5 108.5,61.6 109.1,62.2 110,62.2 110.3,62.5 110.3,65.5 110.1,65.7 108.7,65.7 108.5,65.5
VBUS on L1(Signal) "VBUS_L01_P000" (solid, pour order 0): 117.8,66.6 111.4,66.6 110.6,65.8 110.6,62.5 110.9,62.2 111.9,62.2 112.2,62.5 112.2,64.2 114,66 117.8,66
GND on L2(GND) "GND_L02_P005" (solid, pour order 5): 86,81 cw(c88,81) 88,83 119,83 cw(c119,81) 121,81 121,51.54 cw(c118.46,51.54) 118.46,49 88.54,49 cw(c88.54,51.54) 86,51.54 86,61
GND on L3(GND) "GND_L03_P006" (solid, pour order 6): 86,81 cw(c88,81) 88,83 119,83 cw(c119,81) 121,81 121,51.54 cw(c118.46,51.54) 118.46,49 88.54,49 cw(c88.54,51.54) 86,51.54 86,61

## Silkscreen, mask and mechanical layers (free items; w line width, h text height)
Top Overlay:
  drawing of 532 lines, arcs and shapes, not listed
  text "SWD" at 111.754,76.454 h1.52
  text "USB" at 116.654,61.354 h1.52
  text "GPIO" at 92.854,55.554 h1.52
Mechanical 1:
  lines w0.254: 85.4,49.47 ccw(c86.67,49.47) 86.67,48.2 120.63,48.2 ccw(c120.63,49.47) 121.9,49.47 121.9,57.703 121.9,74.167 121.9,82.4 ccw(c120.4,82.4) 120.4,83.9 86.67,83.9 ccw(c86.67,82.63) 85.4,82.63 85.4,49.47

## Text inside footprints (layer, text, board x,y; h text height)
D1: Mechanical 13 "+" at 117.992,53.517 h0.5 r90
D2: Mechanical 13 "+" at 103.817,64.508 h0.5
J1: Mechanical 13 "PCB EDGE" at 120.95,72.1 h0.41 r90